# Altium PCB TSL1401CS_SensorBoard.PcbDoc
Units mil, origin at the board's own origin, x right, y up, seen from the top; angles counter-clockwise.
Board outline 394.46 x 399 mil, 2 copper layers (Top Layer, Bottom Layer); 4 components, 8 nets, 22 pads, 8 vias.
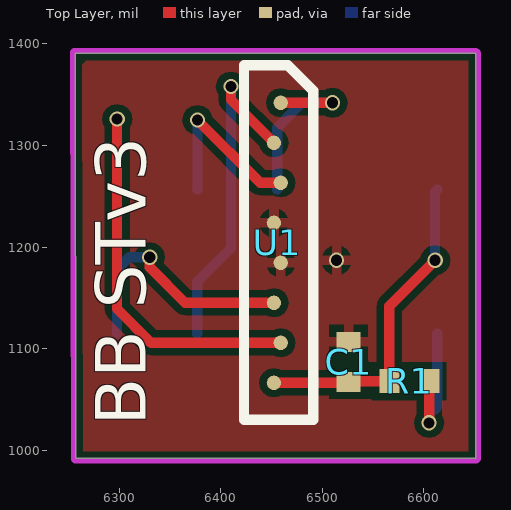
[diagram p0: Top Layer view]
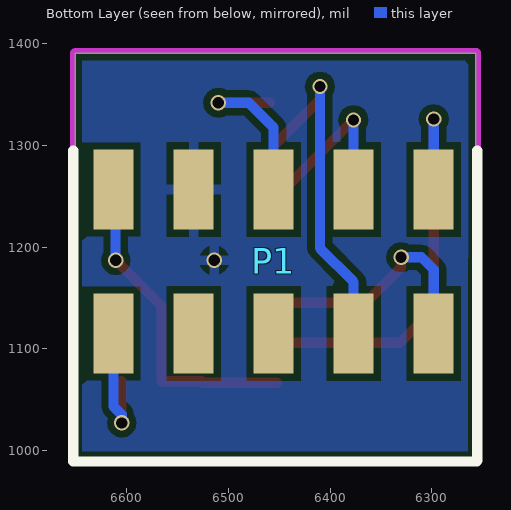
[diagram p1: Bottom Layer view, seen from below]

## Layer stack, top to bottom
Top Layer: signal copper 1.4
Dielectric: dielectric 12.6, FR-4, Dk 4.8
Bottom Layer: signal copper 1.4

## Board outline
6256.54,1391 6257.36,992 6651,992 6651,1390.74

## Design rules (kind name [scope] priority, off if disabled: settings)
Clearance [All] p1: gap=7
PlaneClearance [All] p1: clearance=10
PolygonConnect [All] p1: connectstyle=Relief reliefconductorwidth=10 reliefentries=4 polygonreliefangle="90 Angle"
RoutingVias [All] p1: holewidth=15 width=20 viastyle="Through Hole" minholewidth=15 minwidth=20 maxholewidth=500 maxwidth=500
SilkscreenOverComponentPads [All] p1: minsilkscreentomaskgap=10
SolderMaskExpansion [All] p1: expansion=4
Width [All] p1: maxlimit=50 minlimit=7 preferedwidth=10
26 further rules are at their usual default settings.

## Components (designator, comment, footprint, x,y, rotation, side; value= is the part's Value field where it differs from the comment)
C1 "Cap" C_0402 6526,1107 r270 top
P1 "Header 10" 609-4377-ND 6613,1115 r180 bottom
R1 "Res2" R_0402 6605,1068 r180 top
U1 "TSL1401CS-LF" "TSL1401CS-LF SOLDER BUMP LINEAR ARRAY" 6456,1204 r270 top

## Footprints (in the part's own frame and the unit in brackets; to place one, negate y for a bottom-side part, rotate by r counter-clockwise, add the part's x,y. Pads: shape width x height; smd on the part's side, far side on the other; paste and mask are expansions set on the pad)
609-4377-ND [mm]
  rect 1x2 smd: 1(0,3.6) 2(2,3.6) 3(4,3.6) 4(6,3.6) 5(8,3.6) 6(8,0) 7(6,0) 8(4,0) 9(2,0) 10(0,0)
  silkscreen extent -1.01,-3.2 9.09,4.57
C_0402 [mm]
  rect 0.5x0.6 smd: 1(0.005,-0.005) 2(1.005,-0.005)
R_0402 [mm]
  rect 0.5x0.6 smd: 1(-0.005,0) 2(0.995,0)
"TSL1401CS-LF SOLDER BUMP LINEAR ARRAY" [mm]
  round 0.36 smd mask+0.02: 1(-3.505,0.076) 2(-2.505,-0.094) 3(-1.505,0.076) 4(-0.505,-0.094) 5(0.495,0.076) 6(1.495,-0.094) 7(2.495,0.076) 8(3.495,-0.094)
  silkscreen extent -4.44,-0.84 4.42,0.89

## Part data
C1: "Capacitor"
P1: "Header, 10-Pin"
R1: "Resistor"

## Via types
v1: diameter 15, hole 11, Top Layer to Bottom Layer, 8 vias

## Nets (pads, with @x,y where several pads share a name; then routed paths per layer and width w, separated by ;. In a path a pad name is that pad's centre, name@x,y a point inside that pad or via, vN(x,y) a via of type N, cw(c..) or ccw(c..) an arc to the next point about the centre after c; other vN are vias at no path point)
AO: P1.6 U1.6 | length 246.7
  Top Layer w10: v1(6330,1190) 6330,1180 6364.85,1145.15 U1.6
  Bottom Layer w10: P1.6 P1.6 6298,1178 6310,1190 v1(6330,1190)
CLK: P1.4 U1.3 | length 175.9
  Top Layer w10: v1(6377,1325) 6438.74,1263.26 U1.3
  Bottom Layer w10: P1.4 6377,1256.95 v1(6377,1325)
DETECT: P1.10 R1.1 | length 132.3
  Top Layer w10: v1@6605.2,1027 R1.1
  Bottom Layer w10: v1(6605,1027) 6605,1035 6613,1043 P1.10
GND: C1.1 P1.2 U1.4 U1.5
  other v1: 6514,1187
HOLD: P1.7 U1.2 | length 329.7
  Top Layer w10: v1(6410,1358) 6410,1344.94 U1.2
  Bottom Layer w10: P1.7 6376.78,1165.78 6410,1199 v1(6410,1358)
SI: P1.3 U1.1 | length 176.4
  Top Layer w10: U1.1 v1(6510,1342)
  Bottom Layer w10: P1.3 6455.52,1317.52 6480,1342 v1(6510,1342)
SO: P1.5 U1.7 | length 431
  Top Layer w10: v1(6298,1326) 6298,1139 6331.22,1105.78 U1.7
  Bottom Layer w10: v1(6298,1326) 6298,1256.77 P1.5
VDD: C1.2 P1.1 R1.2 U1.8 | length 322.5
  Top Layer w10: U1.8 6524.78,1066.41 C1.2 6526.37,1068 R1.2 6565.83,1141.83 v1(6611,1187)
  Bottom Layer w10: v1(6611,1187) 6611,1254.73 P1.1
pads on no net: P1.8 P1.9

## Polygon pours and split planes (outlines as drawn)
GND on Bottom Layer "GND Plane" (solid, remove dead copper, pour order 11): 6256.54,1393.5 6259.31,1390.74 6653.5,1390.74 6653.5,992 6653.5,991.99 6254.86,991.99 6254.86,1390.17 6254.04,1391
GND on Top Layer "GND Plane" (solid, remove dead copper, pour order 13): 6254.04,1391 6256.28,1393.24 6651,1393.24 6651,994.5 6653.5,992 6653.5,991.99 6254.86,991.99 6254.86,1390.17 6254.04,1391

## Keep-outs
Keep-Out Layer:
  lines w5: 6254.04,1391 cw(c6256.54,1391) 6256.54,1393.5 ; 6254.04,1391 cw(c6256.54,1391) 6256.54,1393.5 ; 6254.04,1391 6254.86,991.99 ; 6254.86,991.99 ccw(c6257.36,992) 6257.36,989.5 ; 6254.86,991.99 ccw(c6257.36,992) 6257.36,989.5 ; 6256.54,1393.5 6651,1393.24 ; 6257.36,989.5 6651,989.5 ; 6651,989.5 ccw(c6651,992) 6653.5,992 ; 6651,989.5 ccw(c6651,992) 6653.5,992 ; 6651,1393.24 cw(c6651,1390.74) 6653.5,1390.74 ; 6651,1393.24 cw(c6651,1390.74) 6653.5,1390.74 ; 6653.5,992 6653.5,1390.74

## Silkscreen, mask and mechanical layers (free items; w line width, h text height)
Top Overlay:
  text "BB STv3" at 6326,1024 h50 r90